# Allegro board pc043c_single_maroc_28.brd
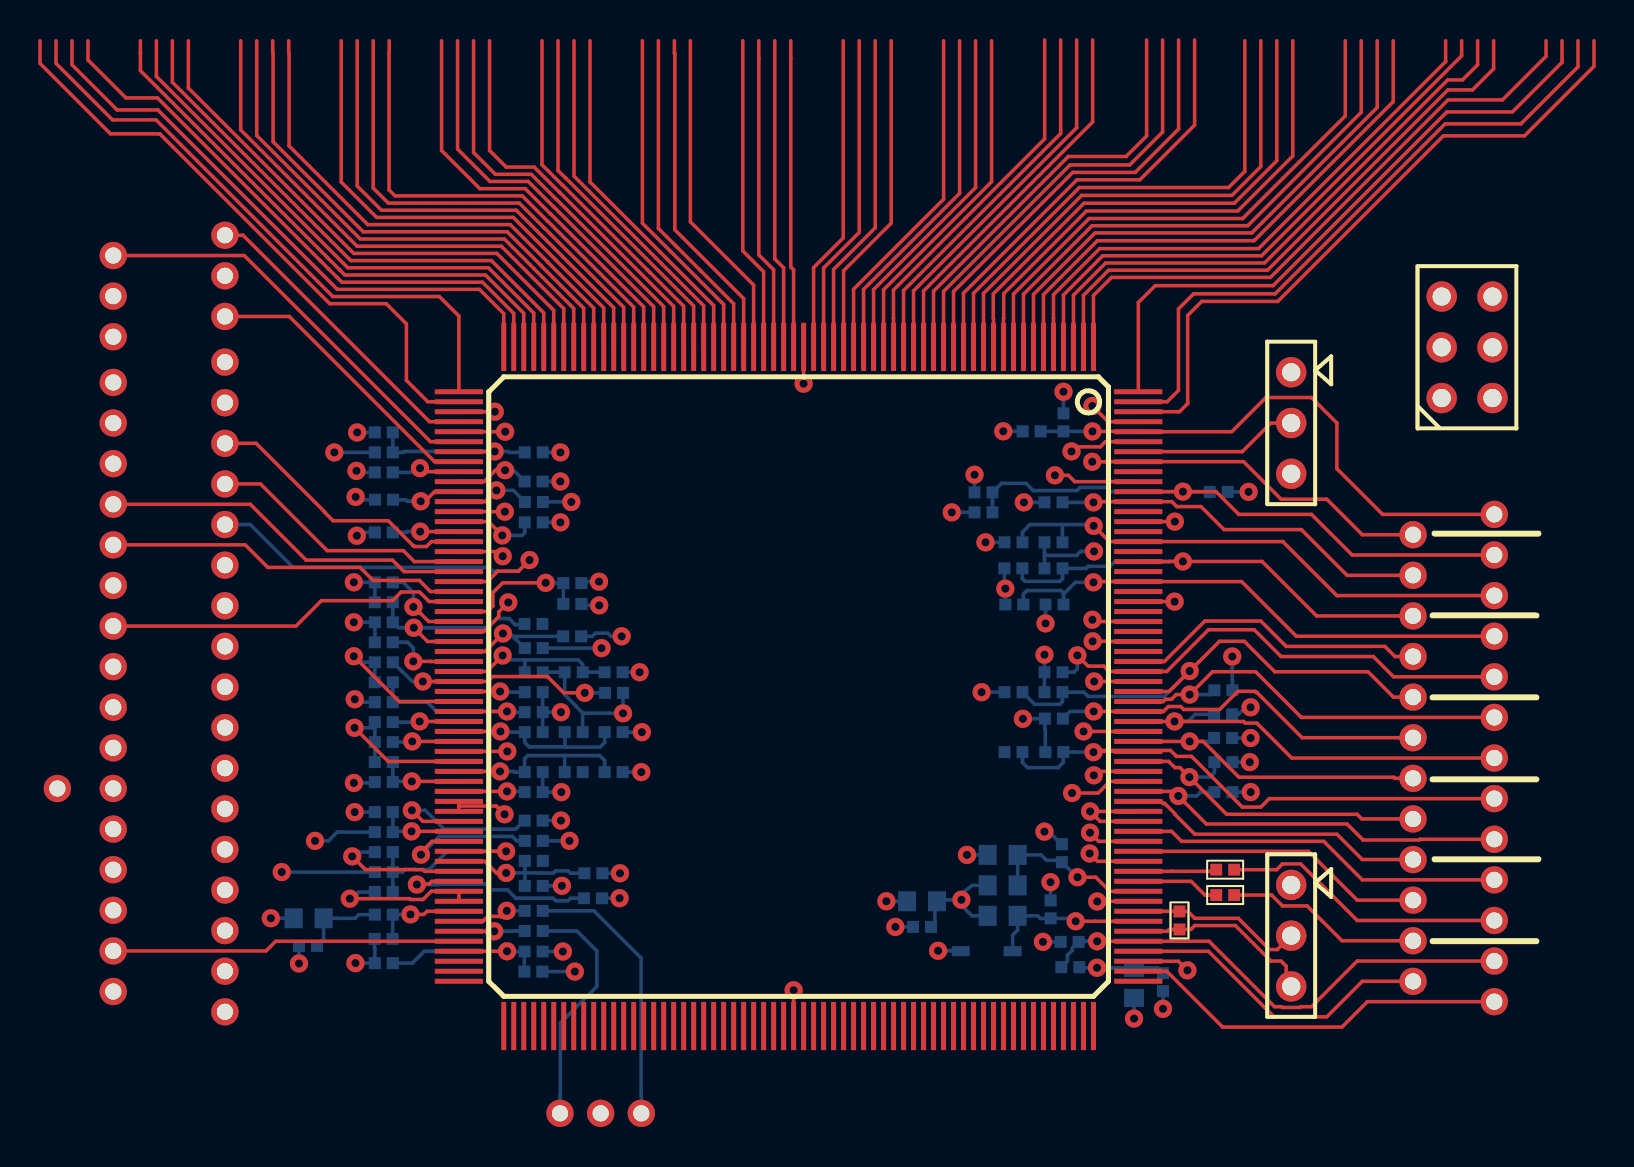
[diagram p0: board, top side]
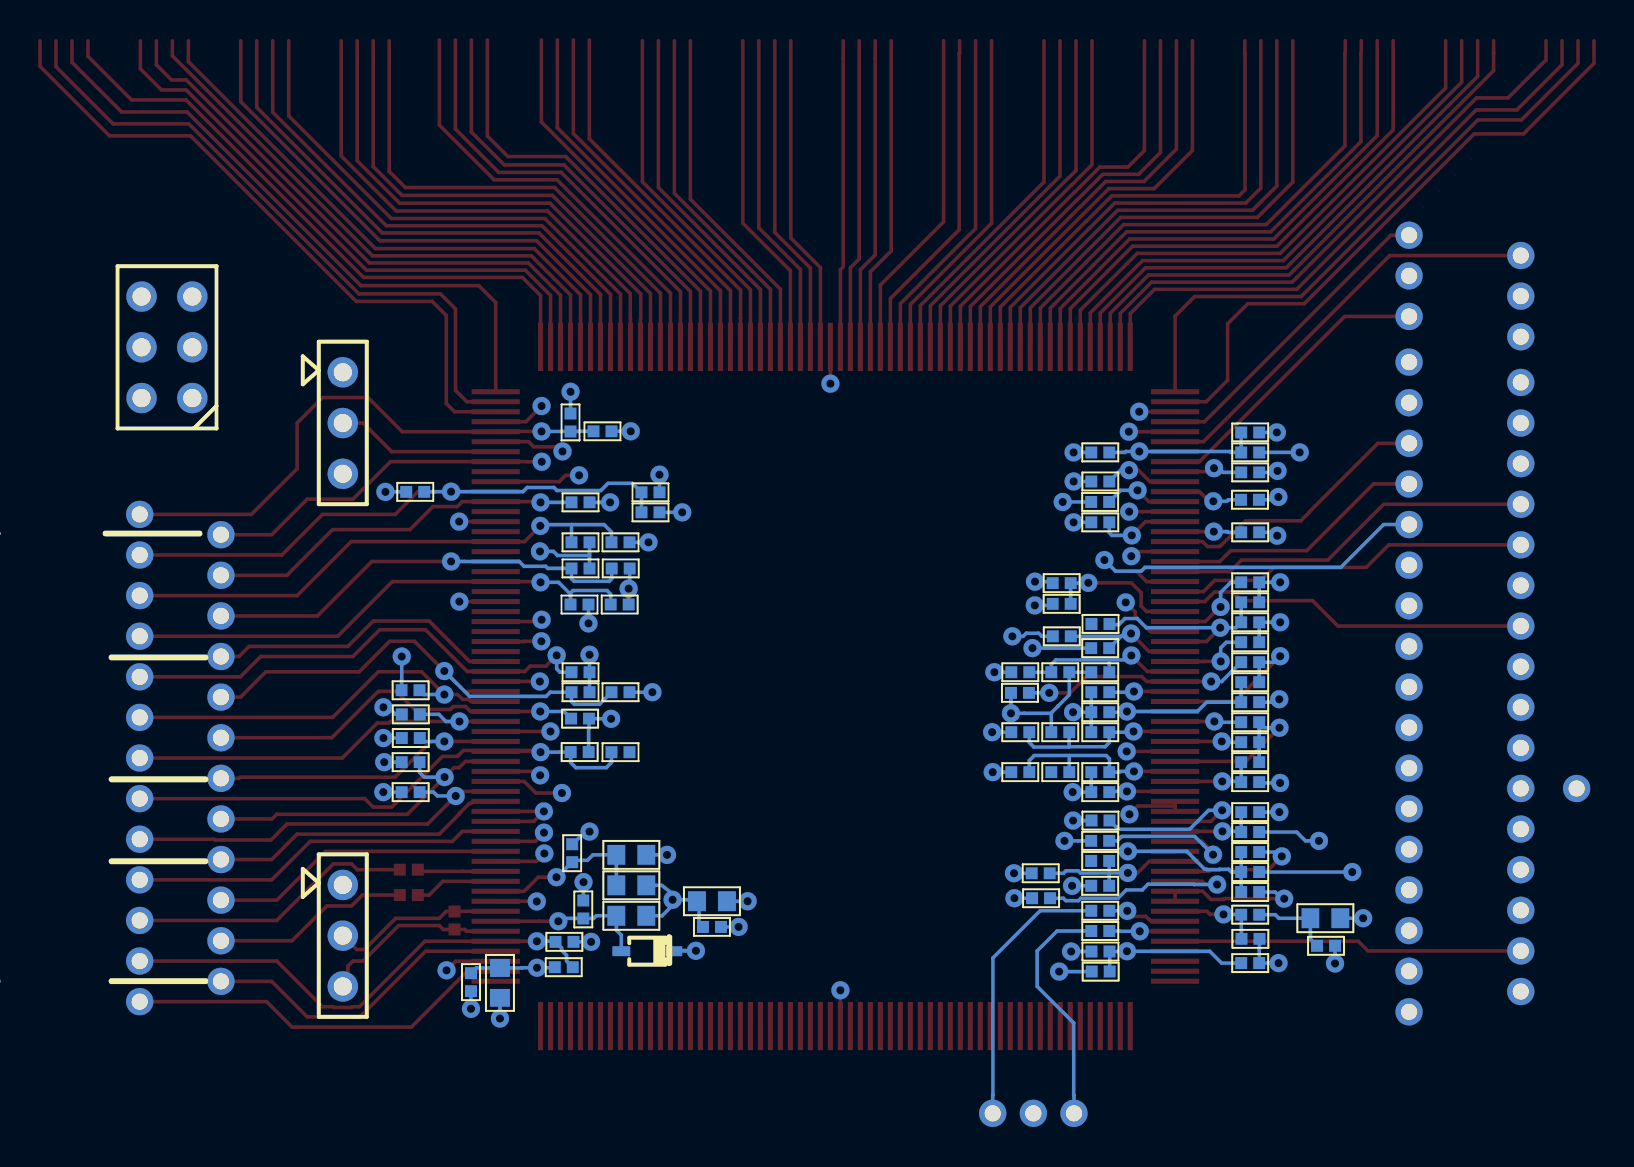
[diagram p1: board, bottom side, seen from below]

No outline. copper layers: TOP, L2, L3, L4, L5, BOTTOM. Coordinates in mm from the lowest, leftmost part position.

## Design rules (mm)
net group OR: nets OR<0> OR<1>
net group ANALOG_IN: nets ANALOG_IN<0> ANALOG_IN<1> ANALOG_IN<2> ANALOG_IN<3> ANALOG_IN<4> ANALOG_IN<5> ANALOG_IN<6> ANALOG_IN<7> ANALOG_IN<8> ANALOG_IN<9> ANALOG_IN<10> ANALOG_IN<11> ANALOG_IN<12> ANALOG_IN<13> ANALOG_IN<14> ANALOG_IN<15> ANALOG_IN<16> ANALOG_IN<17> ANALOG_IN<18> ANALOG_IN<19> ANALOG_IN<20> ANALOG_IN<21> ANALOG_IN<22> ANALOG_IN<23> ANALOG_IN<24> ANALOG_IN<25> ANALOG_IN<26> ANALOG_IN<27> ANALOG_IN<28> ANALOG_IN<29> ANALOG_IN<30> ANALOG_IN<31> ANALOG_IN<32> ANALOG_IN<33> ANALOG_IN<34> ANALOG_IN<35> ANALOG_IN<36> ANALOG_IN<37> ANALOG_IN<38> ANALOG_IN<39> ANALOG_IN<40> ANALOG_IN<41> ANALOG_IN<42> ANALOG_IN<43> ANALOG_IN<44> ANALOG_IN<45> ANALOG_IN<46> ANALOG_IN<47> ANALOG_IN<48> ANALOG_IN<49> ANALOG_IN<50> ANALOG_IN<51> ANALOG_IN<52> ANALOG_IN<53> ANALOG_IN<54> ANALOG_IN<55> ANALOG_IN<56> ANALOG_IN<57> ANALOG_IN<58> ANALOG_IN<59> ANALOG_IN<60> ANALOG_IN<61> ANALOG_IN<62> ANALOG_IN<63>
net group SUM: nets SUM<1> SUM<2> SUM<3> SUM<4> SUM<5> SUM<6> SUM<7> SUM<8>
net group TRIG: nets TRIG<0> TRIG<1> TRIG<2> TRIG<3> TRIG<4> TRIG<5> TRIG<6> TRIG<7> TRIG<8> TRIG<9> TRIG<10> TRIG<11> TRIG<12> TRIG<13> TRIG<14> TRIG<15> TRIG<16> TRIG<17> TRIG<18> TRIG<19> TRIG<20> TRIG<21> TRIG<22> TRIG<23> TRIG<24> TRIG<25> TRIG<26> TRIG<27> TRIG<28> TRIG<29> TRIG<30> TRIG<31> TRIG<32> TRIG<33> TRIG<34> TRIG<35> TRIG<36> TRIG<37> TRIG<38> TRIG<39> TRIG<40> TRIG<41> TRIG<42> TRIG<43> TRIG<44> TRIG<45> TRIG<46> TRIG<47> TRIG<48> TRIG<49> TRIG<50> TRIG<51> TRIG<52> TRIG<53> TRIG<54> TRIG<55> TRIG<56> TRIG<57> TRIG<58> TRIG<59> TRIG<60> TRIG<61> TRIG<62> TRIG<63>

## Placement (name value [footprint] x y rotation side)
C1  100nF  [C0402]  50.64 9.39 180 bottom
C2  100nF  [C0402]  16.32 9.54 0 bottom
C3  100nF  [C0402]  25.75 24.68 180 bottom
C4  100nF  [C0402]  50.33 35.38 270 bottom
C5  100nF  [C0402]  49.83 29.38 0 bottom
C6  100nF  [C0402]  16.33 34.88 0 bottom
C7  100nF  [C0402]  49.83 28.07 0 bottom
C8  100nF  [C0402]  16.33 33.88 0 bottom
C9  100nF  [C0402]  25.76 26.3 180 bottom
C10  100nF  [C0402]  49.88 26.27 0 bottom
C11  100nF  [C0402]  16.33 18.38 0 bottom
C12  100nF  [C0402]  49.83 21.88 0 bottom
C13  100nF  [C0402]  16.33 23.38 0 bottom
C14  100nF  [C0402]  16.33 15.88 0 bottom
C15  100nF  [C0402]  16.33 13.88 0 bottom
C16  100nF  [C0402]  49.87 18.88 0 bottom
C17  100nF  [C0402]  16.33 11.88 0 bottom
C18  100nF  [C0402]  16.33 32.88 0 bottom
C19  100nF  [C0402]  23.83 17.88 180 bottom
C20  100nF  [C0402]  16.33 29.88 0 bottom
C21  100nF  [C0402]  23.83 19.88 180 bottom
C22  100nF  [C0402]  16.33 24.38 0 bottom
C23  100nF  [C0402]  49.85 20.56 0 bottom
C24  100nF  [C0402]  16.33 26.38 0 bottom
C25  100nF  [C0402]  58.33 16.88 180 bottom
C26  100nF  [C0402]  16.33 19.38 0 bottom
C27  100nF  [C0402]  23.83 21.88 180 bottom
C28  100nF  [C0402]  23.83 30.38 180 bottom
C29  100nF  [C0402]  23.83 22.88 0 bottom
C30  100nF  [C0402]  23.83 14.44 180 bottom
C31  100nF  [C0402]  58.33 21.98 180 bottom
C32  100nF  [C0402]  23.83 32.43 180 bottom
C33  100nF  [C0402]  23.83 20.88 180 bottom
C34  100nF  [C0402]  26.81 12.82 180 bottom
C35  100nF  [C0402]  49.83 22.88 0 bottom
C36  100nF  [C0402]  23.84 31.4 180 bottom
C37  100nF  [C0402]  58.33 18.38 180 bottom
C38  100nF  [C0402]  58.1 31.91 180 bottom
C39  100nF  [C0402]  16.34 31.51 0 bottom
C40  100nF  [C0402]  16.33 27.38 0 bottom
C41  100nF  [C0402]  23.83 16.88 180 bottom
C42  100nF  [C0402]  58.32 20.77 180 bottom
C43  100nF  [C0402]  49.83 31.38 0 bottom
C44  100nF  [C0402]  23.82 8.9 180 bottom
C45  100nF  [C0402]  23.82 15.46 180 bottom
C46  100nF  [C0402]  58.32 19.59 180 bottom
C47  100nF  [C0402]  16.33 20.38 0 bottom
C50  100nF  [C0402]  49.69 11.01 270 bottom
C51  100nF  [C0402]  50.25 13.82 270 bottom
C52  10uF  [C0603]  53.86 7.33 90 bottom
C53  10uF  [C0603]  12.57 10.57 0 bottom
C54  10uF  [C0603]  43.25 11.42 0 bottom
D1  -  [SOD323_INV]  46.49 8.92 180 bottom
J1  -  [BAR2X6FD_254]  69.05 0 270 top
J3  -  [CONHE13D3X1M]  61.72 12.24 270 top
J4  -  [CONHE13D3X1M]  61.72 37.89 270 top
LK1  -  [1-HOLE_0-8P]  71.88 8.43 0 top
LK2  -  [1-HOLE_0-8P]  8.38 9.95 0 top
LK3  -  [1-HOLE_0-8P]  2.79 33.32 0 top
LK4  -  [1-HOLE_0-8P]  71.88 30.78 0 top
LK5  -  [1-HOLE_0-8P]  71.88 26.71 0 top
LK6  -  [1-HOLE_0-8P]  67.82 29.76 0 top
LK7  -  [1-HOLE_0-8P]  67.82 25.7 0 top
LK8  -  [1-HOLE_0-8P]  2.79 35.35 0 top
LK9  -  [1-HOLE_0-8P]  71.88 24.68 0 top
LK10  -  [1-HOLE_0-8P]  67.82 21.63 0 top
LK11  -  [1-HOLE_0-8P]  2.79 23.16 0 top
LK12  -  [1-HOLE_0-8P]  8.38 16.05 0 top
LK13  -  [1-HOLE_0-8P]  71.88 16.55 0 top
LK14  -  [1-HOLE_0-8P]  2.79 13 0 top
LK15  -  [1-HOLE_0-8P]  8.38 7.92 0 top
LK16  -  [1-HOLE_0-8P]  8.38 38.4 0 top
LK17  -  [1-HOLE_0-8P]  2.79 15.03 0 top
LK18  -  [1-HOLE_0-8P]  8.38 36.37 0 top
LK19  -  [1-HOLE_0-8P]  8.38 18.08 0 top
LK20  -  [1-HOLE_0-8P]  8.38 24.17 0 top
LK21  -  [1-HOLE_0-8P]  67.82 19.6 0 top
LK22  -  [1-HOLE_0-8P]  2.79 27.22 0 top
LK23  -  [1-HOLE_0-8P]  71.88 14.52 0 top
LK24  -  [1-HOLE_0-8P]  2.79 19.09 0 top
LK25  -  [1-HOLE_0-8P]  8.38 22.14 0 top
LK26  -  [1-HOLE_0-8P]  71.88 6.39 0 top
LK27  -  [1-HOLE_0-8P]  2.79 17.06 0 top
LK28  -  [1-HOLE_0-8P]  71.88 12.49 0 top
LK29  -  [1-HOLE_0-8P]  67.82 11.47 0 top
LK30  -  [1-HOLE_0-8P]  0 17.06 0 top
LK31  -  [1-HOLE_0-8P]  2.79 39.67 0 top
LK32  -  [1-HOLE_0-8P]  8.38 26.21 0 top
LK33  -  [1-HOLE_0-8P]  8.38 11.98 0 top
LK34  -  [1-HOLE_0-8P]  71.88 20.62 0 top
LK35  -  [1-HOLE_0-8P]  8.38 42.72 0 top
LK36  -  [1-HOLE_0-8P]  2.79 21.13 0 top
LK37  -  [1-HOLE_0-8P]  2.79 6.9 0 top
LK38  -  [1-HOLE_0-8P]  71.88 22.65 0 top
LK39  -  [1-HOLE_0-8P]  2.79 41.7 0 top
LK40  -  [1-HOLE_0-8P]  67.82 15.54 0 top
LK41  -  [1-HOLE_0-8P]  71.88 28.75 0 top
LK42  -  [1-HOLE_0-8P]  2.79 37.38 0 top
LK43  -  [1-HOLE_0-8P]  8.38 28.24 0 top
LK44  -  [1-HOLE_0-8P]  2.79 10.97 0 top
LK45  -  [1-HOLE_0-8P]  71.88 18.59 0 top
LK46  -  [1-HOLE_0-8P]  67.82 27.73 0 top
LK47  -  [1-HOLE_0-8P]  8.38 5.89 0 top
LK48  -  [1-HOLE_0-8P]  8.38 14.01 0 top
LK49  -  [1-HOLE_0-8P]  67.82 17.57 0 top
LK50  -  [1-HOLE_0-8P]  8.38 20.11 0 top
LK51  -  [1-HOLE_0-8P]  67.82 9.44 0 top
LK52  -  [1-HOLE_0-8P]  71.88 10.46 0 top
LK53  -  [1-HOLE_0-8P]  8.38 30.27 0 top
LK54  -  [1-HOLE_0-8P]  25.15 0.81 0 top
LK55  -  [1-HOLE_0-8P]  27.18 0.81 0 top
LK56  -  [1-HOLE_0-8P]  29.21 0.81 0 top
LK57  -  [1-HOLE_0-8P]  8.38 40.68 0 top
LK58  -  [1-HOLE_0-8P]  67.82 23.67 0 top
LK59  -  [1-HOLE_0-8P]  2.79 8.93 0 top
LK60  -  [1-HOLE_0-8P]  8.38 44.75 0 top
LK61  -  [1-HOLE_0-8P]  8.38 34.33 0 top
LK62  -  [1-HOLE_0-8P]  2.79 31.29 0 top
LK63  -  [1-HOLE_0-8P]  67.82 13.51 0 top
LK64  -  [1-HOLE_0-8P]  8.38 32.3 0 top
LK65  -  [1-HOLE_0-8P]  2.79 29.25 0 top
LK66  -  [1-HOLE_0-8P]  2.79 43.73 0 top
LK67  -  [1-HOLE_0-8P]  2.79 25.19 0 top
LK68  -  [1-HOLE_0-8P]  67.82 7.41 0 top
R1  51  [C0402]  58.42 11.73 0 top
R2  51  [C0402]  58.42 13 0 top
R3  10  [C0402]  50.67 8.12 180 bottom
R4  10  [C0402]  16.33 10.75 0 bottom
R5  10  [C0402]  23.83 24.09 0 bottom
R6  10  [C0402]  48.73 34.94 180 bottom
R7  10  [C0402]  47.83 29.38 180 bottom
R8  10  [C0402]  23.83 33.88 0 bottom
R9  10  [C0402]  47.82 28.07 180 bottom
R10  10  [C0402]  25.76 27.34 0 bottom
R11  10  [C0402]  47.87 26.27 180 bottom
R12  10  [C0402]  16.33 17.38 180 bottom
R13  10  [C0402]  47.83 21.88 180 bottom
R14  100  [C0402]  27.85 21.85 0 bottom
R15  10  [C0402]  16.33 14.88 180 bottom
R16  10  [C0402]  16.33 12.88 180 bottom
R17  100  [C0402]  47.83 18.88 180 bottom
R18  51  [C0402]  23.83 9.93 180 bottom
R19  51  [C0402]  23.83 10.94 180 bottom
R20  XX  [C0402]  25.83 17.88 0 bottom
R21  XX  [C0402]  27.83 17.88 180 bottom
R22  XX  [C0402]  25.83 19.88 0 bottom
R23  XX  [C0402]  27.83 19.88 180 bottom
R24  100  [C0402]  56.13 10.46 270 top
R25  XX  [C0402]  23.82 25.3 0 bottom
R26  XX  [C0402]  16.33 25.38 0 bottom
R27  1k  [C0402]  26.79 11.57 0 bottom
R28  XX  [C0402]  25.83 22.88 180 bottom
R29  XX  [C0402]  27.83 22.88 180 bottom
R30  XX  [C0402]  16.33 21.38 180 bottom
R31  XX  [C0402]  16.33 22.38 0 bottom
R32  XX  [C0402]  23.83 13.44 0 bottom
R33  XX  [C0402]  23.83 12.19 180 bottom
R34  XX  [C0402]  46.33 31.88 180 bottom
R35  XX  [C0402]  46.33 30.88 0 bottom
R36  XX  [C0402]  23.81 7.9 0 bottom
R37  XX  [C0402]  16.33 8.32 0 bottom
R42  82  [C0603]  47.29 10.69 180 bottom
R44  150  [C0603]  47.29 12.22 180 bottom
R45  120  [C0603]  47.29 13.74 0 bottom
R46  3.3  [C0402]  55.31 7.37 90 bottom
R47  3.3  [C0402]  12.54 9.19 0 bottom
R48  3.3  [C0402]  43.25 10.14 180 bottom
U1  -  [PQFP240_050]  51.83 39.16 270 top

## Library data of the parts
C1-C47 C50 C51 = CAPCERSMDCL2: part number: CAPCERSMDCL2_0402-100NF,16V_GEN; tolerance: 10%
C52-C54 = CAPCERSMDCL2: part number: CAPCERSMDCL2_0603-10UF_X5R,6.3V; tolerance: 5%
D1 = DIODE_CA: part number: DIODE_CA_SCHOTTKY-RB751V40T1
J1 = CON6P: part number: CON6P-SSW103_01GD
J3 J4 = CON3P: part number: CON3P-SIL254D
LK1-LK68 = 1-HOLE: part number: 1-HOLE_0-8-BASE
R1 R2 R18 R19 = RSMD0402: part number: RSMD0402_1/16W-51,1%; tolerance: 1%
R3-R13 R15 R16 = RSMD0402: part number: RSMD0402_1/16W-10R,5%; tolerance: 5%
R14 R17 = RSMD0402: part number: RSMD0402_1/16W-100,0.1%_GEN; tolerance: 0.1%
R20-R23 R25 R26 R28-R37 = RSMD0402: part number: RSMD0402_0.0625W-XX,1%; tolerance: 1%
R24 = RSMD0402: part number: RSMD0402_1/16W-100,1%; tolerance: 1%
R27 = RSMD0402: part number: RSMD0402_1/16W-1K,5%; tolerance: 5%
R42 = RSMD0603: part number: RSMD0603_1/10W-82,1%; tolerance: 1%
R44 = RSMD0603: part number: RSMD0603_1/10W-150,1%; tolerance: 1%
R45 = RSMD0603: part number: RSMD0603_1/10W-120,1%; tolerance: 1%
R46-R48 = RSMD0402: part number: RSMD0402_1/16W-3.3R,5%; tolerance: 5%
U1 = MAROC3: part number: MAROC3_PQFP-IN2P3

## Footprints (pads in the part's own frame, mm; a bottom-side part is the same pattern mirrored in y, then rotated)
1-HOLE_0-8P
  round 1.372 hole 0.813: 1(0,0)
BAR2X6FD_254
  round 1.524 hole 0.914: 1(-36.6,0.2) 2(-36.6,2.74) 3(-39.14,0.2) 4(-39.14,2.74) 5(-41.68,0.2) 6(-41.68,2.74)
C0402
  rect 0.6x0.6 smd: 1(-0.45,0) 2(0.45,0)
C0603
  rect 0.9x1 smd: 1(-0.75,0) 2(0.75,0)
CONHE13D3X1M
  round 1.524 hole 0.914: 1(0,0) 2(2.54,0) 3(5.08,0)
PQFP240_050
  rect 2.413x0.254 smd: 1(0,0) 2(0,-0.5) 3(0,-1) 4(0,-1.5) 5(0,-2) 6(0,-2.5) 7(0,-3) 8(0,-3.5) 9(0,-4) 10(0,-4.5) 11(0,-5) 12(0,-5.5) 13(0,-6) 14(0,-6.5) 15(0,-7) 16(0,-7.5) 17(0,-8) 18(0,-8.5) 19(0,-9) 20(0,-9.5) 21(0,-10) 22(0,-10.5) 23(0,-11) 24(0,-11.5) 25(0,-12) 26(0,-12.5) 27(0,-13) 28(0,-13.5) 29(0,-14) 30(0,-14.5) 31(0,-15) 32(0,-15.5) 33(0,-16) 34(0,-16.5) 35(0,-17) 36(0,-17.5) 37(0,-18) 38(0,-18.5) 39(0,-19) 40(0,-19.5) 41(0,-20) 42(0,-20.5) 43(0,-21) 44(0,-21.5) 45(0,-22) 46(0,-22.5) 47(0,-23) 48(0,-23.5) 49(0,-24) 50(0,-24.5) 51(0,-25) 52(0,-25.5) 53(0,-26) 54(0,-26.5) 55(0,-27) 56(0,-27.5) 57(0,-28) 58(0,-28.5) 59(0,-29) 60(0,-29.5) 121(33.987,-29.5) 122(33.987,-29) 123(33.987,-28.5) 124(33.987,-28) 125(33.987,-27.5) 126(33.987,-27) 127(33.987,-26.5) 128(33.987,-26) 129(33.987,-25.5) 130(33.987,-25) 131(33.987,-24.5) 132(33.987,-24) 133(33.987,-23.5) 134(33.987,-23) 135(33.987,-22.5) 136(33.987,-22) 137(33.987,-21.5) 138(33.987,-21) 139(33.987,-20.5) 140(33.987,-20) 141(33.987,-19.5) 142(33.987,-19) 143(33.987,-18.5) 144(33.987,-18) 145(33.987,-17.5) 146(33.987,-17) 147(33.987,-16.5) 148(33.987,-16) 149(33.987,-15.5) 150(33.987,-15) 151(33.987,-14.5) 152(33.987,-14) 153(33.987,-13.5) 154(33.987,-13) 155(33.987,-12.5) 156(33.987,-12) 157(33.987,-11.5) 158(33.987,-11) 159(33.987,-10.5) 160(33.987,-10) 161(33.987,-9.5) 162(33.987,-9) 163(33.987,-8.5) 164(33.987,-8) 165(33.987,-7.5) 166(33.987,-7) 167(33.987,-6.5) 168(33.987,-6) 169(33.987,-5.5) 170(33.987,-5) 171(33.987,-4.5) 172(33.987,-4) 173(33.987,-3.5) 174(33.987,-3) 175(33.987,-2.5) 176(33.987,-2) 177(33.987,-1.5) 178(33.987,-1) 179(33.987,-0.5) 180(33.987,0)
  rect 0.254x2.413 smd: 61(2.244,-31.744) 62(2.744,-31.744) 63(3.244,-31.744) 64(3.744,-31.744) 65(4.244,-31.744) 66(4.744,-31.744) 67(5.244,-31.744) 68(5.744,-31.744) 69(6.244,-31.744) 70(6.744,-31.744) 71(7.244,-31.744) 72(7.744,-31.744) 73(8.243,-31.744) 74(8.743,-31.744) 75(9.243,-31.744) 76(9.743,-31.744) 77(10.243,-31.744) 78(10.743,-31.744) 79(11.243,-31.744) 80(11.743,-31.744) 81(12.243,-31.744) 82(12.743,-31.744) 83(13.243,-31.744) 84(13.743,-31.744) 85(14.243,-31.744) 86(14.743,-31.744) 87(15.243,-31.744) 88(15.743,-31.744) 89(16.244,-31.744) 90(16.744,-31.744) 91(17.244,-31.744) 92(17.744,-31.744) 93(18.244,-31.744) 94(18.744,-31.744) 95(19.244,-31.744) 96(19.744,-31.744) 97(20.244,-31.744) 98(20.744,-31.744) 99(21.244,-31.744) 100(21.744,-31.744) 101(22.244,-31.744) 102(22.744,-31.744) 103(23.244,-31.744) 104(23.744,-31.744) 105(24.244,-31.744) 106(24.744,-31.744) 107(25.244,-31.744) 108(25.744,-31.744) 109(26.244,-31.744) 110(26.744,-31.744) 111(27.244,-31.744) 112(27.744,-31.744) 113(28.244,-31.744) 114(28.744,-31.744) 115(29.244,-31.744) 116(29.744,-31.744) 117(30.244,-31.744) 118(30.744,-31.744) 119(31.244,-31.744) 120(31.744,-31.744) 181(31.744,2.244) 182(31.244,2.244) 183(30.744,2.244) 184(30.244,2.244) 185(29.744,2.244) 186(29.244,2.244) 187(28.744,2.244) 188(28.244,2.244) 189(27.744,2.244) 190(27.244,2.244) 191(26.744,2.244) 192(26.244,2.244) 193(25.744,2.244) 194(25.244,2.244) 195(24.744,2.244) 196(24.244,2.244) 197(23.744,2.244) 198(23.244,2.244) 199(22.744,2.244) 200(22.244,2.244) 201(21.744,2.244) 202(21.244,2.244) 203(20.744,2.244) 204(20.244,2.244) 205(19.744,2.244) 206(19.244,2.244) 207(18.744,2.244) 208(18.244,2.244) 209(17.744,2.244) 210(17.244,2.244) 211(16.744,2.244) 212(16.244,2.244) 213(15.743,2.244) 214(15.243,2.244) 215(14.743,2.244) 216(14.243,2.244) 217(13.743,2.244) 218(13.243,2.244) 219(12.743,2.244) 220(12.243,2.244) 221(11.743,2.244) 222(11.243,2.244) 223(10.743,2.244) 224(10.243,2.244) 225(9.743,2.244) 226(9.243,2.244) 227(8.743,2.244) 228(8.243,2.244) 229(7.744,2.244) 230(7.244,2.244) 231(6.744,2.244) 232(6.244,2.244) 233(5.744,2.244) 234(5.244,2.244) 235(4.744,2.244) 236(4.244,2.244) 237(3.744,2.244) 238(3.244,2.244) 239(2.744,2.244) 240(2.244,2.244)
SOD323_INV
  rect 0.9x0.5 smd: 1(1.3,0) 2(-1.3,0)

## Nets
AVDD: C29.2(B<0>) J1.6(A<5>) R5.2(B<0>) R6.2(B<0>) R7.2(B<0>) R8.2(B<0>) R9.2(B<0>) R10.2(B<0>) R11.2(B<0>) R12.2(B<0>) R13.2(B<0>) R14.2(B<0>) R15.2(B<0>) R16.2(B<0>) R17.2(B<0>) R20.2(B<0>) R22.2(B<0>) R25.2(B<0>) R27.2(B<0>) R28.2(B<0>) R30.2(B<0>) R32.2(B<0>) R34.2(B<0>) R36.2(B<0>) R46.1(A<0>) R47.1(A<0>) R48.2(B<0>)
GND_SIGNAL: C1.2(B<0>) C2.1(A<0>) C3.1(A<0>) C4.1(A<0>) C5.1(A<0>) C6.1(A<0>) C7.1(A<0>) C8.1(A<0>) C9.1(A<0>) C10.1(A<0>) C11.1(A<0>) C12.1(A<0>) C13.1(A<0>) C14.1(A<0>) C15.1(A<0>) C16.1(A<0>) C17.1(A<0>) C18.1(A<0>) C19.1(A<0>) C20.1(A<0>) C21.1(A<0>) C22.1(A<0>) C23.1(A<0>) C24.1(A<0>) C25.1(A<0>) C26.1(A<0>) C27.1(A<0>) C28.1(A<0>) C30.1(A<0>) C31.1(A<0>) C32.1(A<0>) C33.1(A<0>) C34.1(A<0>) C35.1(A<0>) C36.1(A<0>) C37.1(A<0>) C38.1(A<0>) C39.1(A<0>) C40.1(A<0>) C41.1(A<0>) C42.1(A<0>) C43.1(A<0>) C44.1(A<0>) C45.1(A<0>) C46.1(A<0>) C47.1(A<0>) C50.1(A<0>) C51.1(A<0>) C52.1(A<0>) C53.1(A<0>) C54.1(A<0>) D1.1(K<0>) J1.2(A<1>) J1.4(A<3>) J1.5(A<4>) J3.1(A<0>) J4.3(A<2>) LK30.1(A<0>) LK55.1(A<0>) R21.1(A<0>) R23.1(A<0>) R26.1(A<0>) R29.1(A<0>) R31.1(A<0>) R33.1(A<0>) R35.1(A<0>) R37.1(A<0>) R45.1(A<0>) U1.30(GND_PA2) U1.63(GND_PA) U1.65(VSSA) U1.73(GND_NMOS) U1.77(GND_W) U1.85(GND_DAC) U1.92(E_FSU) U1.98(GND_WILK) U1.102(VSSA2) U1.103(VSSM) U1.109(GND_DISCRI) U1.111(VSSD) U1.112(GNDD) U1.150(VSSD2) U1.183(GNDD2) U1.189(VSSD3) U1.195(GND_DISCRI2) U1.197(VSSM2) U1.198(VSS) U1.202(GND_FSU) U1.206(GND_FSB1) U1.211(GND_FSB0) U1.217(GND_CAPA) U1.219(GND_SS) U1.227(GND_OTAG) U1.231(GND_NMOS2) U1.235(VSSI) U1.237(GND_PA3)
VDD_BUF1: C7.2(B<0>) LK7.1(A<0>) R9.1(A<0>) U1.223(VDD_BUF1)
VDD_DAC: C3.2(B<0>) LK3.1(A<0>) R5.1(A<0>) U1.87(VDD_DAC)
VDD_DISCRI: C14.2(B<0>) LK14.1(A<0>) R15.1(A<0>) U1.105(VDD_DISCRI)
VDD_DISCRIADC: C15.2(B<0>) C17.2(B<0>) LK15.1(A<0>) R16.1(A<0>) U1.107(VDD_DISCRIADC) U1.193(VDD_DISCRIADC2)
VDD_FSB: C12.2(B<0>) LK10.1(A<0>) R13.1(A<0>) U1.210(VDD_FSB)
VDD_FSU1: C13.2(B<0>) LK11.1(A<0>) R14.1(A<0>) U1.90(VDD_FSU1)
VDD_FSU2: C16.2(B<0>) LK13.1(A<0>) R17.1(A<0>) U1.204(VDD_FSU2)
VDD_OTAG: C5.2(B<0>) LK5.1(A<0>) R7.1(A<0>) U1.225(VDD_OTAG)
VDD_PA: C6.2(B<0>) C8.2(B<0>) LK6.1(A<0>) R8.1(A<0>) U1.67(VDD_PA) U1.233(VDD_PA2)
VDD_PAD: C4.2(B<0>) LK4.1(A<0>) R6.1(A<0>) U1.236(VDD_PAD)
VDD_SS: C10.2(B<0>) LK9.1(A<0>) R11.1(A<0>) U1.221(VDD_SS)
VDD_W: C9.2(B<0>) LK8.1(A<0>) R10.1(A<0>) U1.83(VDD_W)
VDD_WILK: C11.2(B<0>) LK12.1(A<0>) R12.1(A<0>) U1.100(VDD_WILK)
VDDD: C1.1(A<0>) LK1.1(A<0>) R3.2(B<0>) U1.185(VDDD)
VDDD2: C2.2(B<0>) LK2.1(A<0>) R4.2(B<0>) U1.113(VDDD2)
ADC_DAV: LK54.1(A<0>) R18.1(A<0>)
ANALOG_IN<0>: U1.238(IN0)
ANALOG_IN<1>: U1.239(IN1)
ANALOG_IN<2>: U1.240(IN2)
ANALOG_IN<3>: U1.1(IN3)
ANALOG_IN<4>: U1.2(IN4)
ANALOG_IN<5>: U1.3(IN5)
ANALOG_IN<6>: U1.4(IN6)
ANALOG_IN<7>: U1.5(IN7)
ANALOG_IN<8>: U1.6(IN8)
ANALOG_IN<9>: U1.7(IN9)
ANALOG_IN<10>: U1.8(IN10)
ANALOG_IN<11>: U1.9(IN11)
ANALOG_IN<12>: U1.10(IN12)
ANALOG_IN<13>: U1.11(IN13)
ANALOG_IN<14>: U1.12(IN14)
ANALOG_IN<15>: U1.13(IN15)
ANALOG_IN<16>: U1.14(IN16)
ANALOG_IN<17>: U1.15(IN17)
ANALOG_IN<18>: U1.16(IN18)
ANALOG_IN<19>: U1.17(IN19)
ANALOG_IN<20>: U1.18(IN20)
ANALOG_IN<21>: U1.19(IN21)
ANALOG_IN<22>: U1.20(IN22)
ANALOG_IN<23>: U1.21(IN23)
ANALOG_IN<24>: U1.22(IN24)
ANALOG_IN<25>: U1.23(IN25)
ANALOG_IN<26>: U1.24(IN26)
ANALOG_IN<27>: U1.25(IN27)
ANALOG_IN<28>: U1.26(IN28)
ANALOG_IN<29>: U1.27(IN29)
ANALOG_IN<30>: U1.28(IN30)
ANALOG_IN<31>: U1.29(IN31)
ANALOG_IN<32>: U1.31(IN32)
ANALOG_IN<33>: U1.32(IN33)
ANALOG_IN<34>: U1.33(IN34)
ANALOG_IN<35>: U1.34(IN35)
ANALOG_IN<36>: U1.35(IN36)
ANALOG_IN<37>: U1.36(IN37)
ANALOG_IN<38>: U1.37(IN38)
ANALOG_IN<39>: U1.38(IN39)
ANALOG_IN<40>: U1.39(IN40)
ANALOG_IN<41>: U1.40(IN41)
ANALOG_IN<42>: U1.41(IN42)
ANALOG_IN<43>: U1.42(IN43)
ANALOG_IN<44>: U1.43(IN44)
ANALOG_IN<45>: U1.44(IN45)
ANALOG_IN<46>: U1.45(IN46)
ANALOG_IN<47>: U1.46(IN47)
ANALOG_IN<48>: U1.47(IN48)
ANALOG_IN<49>: U1.48(IN49)
ANALOG_IN<50>: U1.49(IN50)
ANALOG_IN<51>: U1.50(IN51)
ANALOG_IN<52>: U1.51(IN52)
ANALOG_IN<53>: U1.52(IN53)
ANALOG_IN<54>: U1.53(IN54)
ANALOG_IN<55>: U1.54(IN55)
ANALOG_IN<56>: U1.55(IN56)
ANALOG_IN<57>: U1.56(IN57)
ANALOG_IN<58>: U1.57(IN58)
ANALOG_IN<59>: U1.58(IN59)
ANALOG_IN<60>: U1.59(IN60)
ANALOG_IN<61>: U1.60(IN61)
ANALOG_IN<62>: U1.61(IN62)
ANALOG_IN<63>: U1.62(IN63)
CK_40M: J3.2(A<1>) R24.1(A<0>) U1.188(CK_40M)
CK_R: LK64.1(A<0>) U1.78(CK_R)
CK_SC: LK57.1(A<0>) U1.68(CK_SC)
CKB_40M: J3.3(A<2>) R24.2(B<0>) U1.186(CKB_40M)
CTEST: J4.1(A<0>)
D_R: LK67.1(A<0>) U1.82(D_R)
D_SC: LK60.1(A<0>) U1.64(D_SC)
EN_OTAG: LK58.1(A<0>) U1.213(EN_OTAG)
G_DIODE: C27.2(B<0>) LK25.1(A<0>) U1.91(G_DIODE)
HOLD1: LK62.1(A<0>) U1.79(HOLD1)
HOLD2: LK65.1(A<0>) U1.81(HOLD2)
IB_INTEG: C41.2(B<0>) LK44.1(A<0>) U1.101(IB_INTEG)
IB_SUM: C35.2(B<0>) LK38.1(A<0>) U1.212(IB_SUM)
IB_W: C31.2(B<0>) LK34.1(A<0>) U1.209(IB_W)
IBI_BUF: C28.2(B<0>) LK31.1(A<0>) U1.74(IBI_BUF)
IBI_SS: C32.2(B<0>) LK35.1(A<0>) U1.70(IBI_SS)
IBO_DAC: C40.2(B<0>) LK43.1(A<0>) U1.84(IBO_DAC)
IBO_SS: C36.2(B<0>) LK39.1(A<0>) U1.72(IBO_SS)
IREF_DAC: C24.2(B<0>) LK22.1(A<0>) R25.1(A<0>) R26.2(B<0>) U1.86(IREF_DAC)
OR<0>: LK51.1(A<0>) R1.2(B<0>)
OR<1>: LK52.1(A<0>) R2.2(B<0>)
OUT_ADC: LK56.1(A<0>) R19.1(A<0>)
OUT_FS: J1.3(A<2>) U1.201(OUT_FS)
OUT_Q: J1.1(A<0>) U1.215(OUT_Q)
PWR_ON: R27.1(A<0>) U1.110(PWR_ON)
QBUF_R: LK61.1(A<0>) U1.76(QBUF_R)
QBUF_SC: LK63.1(A<0>) U1.199(QBUF_SC)
RAMP: LK27.1(A<0>) U1.97(RAMP)
RSTB_R: LK53.1(A<0>) U1.80(RSTB_R)
RSTN_ADC: LK68.1(A<0>) U1.184(RSTN_ADC)
RSTN_SC: LK66.1(A<0>) U1.66(RSTN_SC)
START_ADCB: LK59.1(A<0>) U1.116(START_ADCB)
SUM<1>: U1.228(SUM1)
SUM<2>: U1.226(SUM2)
SUM<3>: U1.224(SUM3)
SUM<4>: U1.222(SUM4)
SUM<5>: U1.220(SUM5)
SUM<6>: U1.218(SUM6)
SUM<7>: U1.216(SUM7)
SUM<8>: U1.214(SUM8)
TRIG<0>: LK26.1(A<0>) U1.182(OUT0)
TRIG<1>: U1.181(OUT1)
TRIG<2>: U1.180(OUT2)
TRIG<3>: U1.179(OUT3)
TRIG<4>: U1.178(OUT4)
TRIG<5>: U1.177(OUT5)
TRIG<6>: U1.176(OUT6)
TRIG<7>: U1.175(OUT7)
TRIG<8>: U1.174(OUT8)
TRIG<9>: U1.173(OUT9)
TRIG<10>: U1.172(OUT10)
TRIG<11>: U1.171(OUT11)
TRIG<12>: U1.170(OUT12)
TRIG<13>: U1.169(OUT13)
TRIG<14>: U1.168(OUT14)
TRIG<15>: U1.167(OUT15)
TRIG<16>: U1.166(OUT16)
TRIG<17>: U1.165(OUT17)
TRIG<18>: U1.164(OUT18)
TRIG<19>: U1.163(OUT19)
TRIG<20>: U1.162(OUT20)
TRIG<21>: U1.161(OUT21)
TRIG<22>: U1.160(OUT22)
TRIG<23>: U1.159(OUT23)
TRIG<24>: U1.158(OUT24)
TRIG<25>: U1.157(OUT25)
TRIG<26>: U1.156(OUT26)
TRIG<27>: U1.155(OUT27)
TRIG<28>: U1.154(OUT28)
TRIG<29>: U1.153(OUT29)
TRIG<30>: U1.152(OUT30)
TRIG<31>: U1.151(OUT31)
TRIG<32>: U1.149(OUT32)
TRIG<33>: U1.148(OUT33)
TRIG<34>: U1.147(OUT34)
TRIG<35>: U1.146(OUT35)
TRIG<36>: U1.145(OUT36)
TRIG<37>: U1.144(OUT37)
TRIG<38>: U1.143(OUT38)
TRIG<39>: U1.142(OUT39)
TRIG<40>: U1.141(OUT40)
TRIG<41>: U1.140(OUT41)
TRIG<42>: U1.139(OUT42)
TRIG<43>: U1.138(OUT43)
TRIG<44>: U1.137(OUT44)
TRIG<45>: U1.136(OUT45)
TRIG<46>: U1.135(OUT46)
TRIG<47>: U1.134(OUT47)
TRIG<48>: U1.133(OUT48)
TRIG<49>: U1.132(OUT49)
TRIG<50>: U1.131(OUT50)
TRIG<51>: U1.130(OUT51)
TRIG<52>: U1.129(OUT52)
TRIG<53>: U1.128(OUT53)
TRIG<54>: U1.127(OUT54)
TRIG<55>: U1.126(OUT55)
TRIG<56>: U1.125(OUT56)
TRIG<57>: U1.124(OUT57)
TRIG<58>: U1.123(OUT58)
TRIG<59>: U1.122(OUT59)
TRIG<60>: U1.121(OUT60)
TRIG<61>: U1.120(OUT61)
TRIG<62>: U1.119(OUT62)
TRIG<63>: U1.118(OUT63)
UNNAMED_1_MAROC3_I1_OR0: R1.1(A<0>) U1.191(OR_0)
UNNAMED_1_MAROC3_I1_OR1: R2.1(A<0>) U1.192(OR_1)
UNNAMED_2_CAPCERSMDCL2_I82_B: C53.2(B<0>) R4.1(A<0>) R47.2(B<0>)
UNNAMED_2_CAPCERSMDCL2_I84_B: C52.2(B<0>) R3.1(A<0>) R46.2(B<0>)
UNNAMED_3_CAPCERSMDCL2_I242_B: C54.2(B<0>) R42.2(B<0>) R44.2(B<0>) R48.1(A<0>)
UNNAMED_3_CON3P_I231_A: J4.2(A<1>) U1.234(CTEST)
UNNAMED_3_MAROC3_I1_ADCDAV: R18.2(B<0>) U1.115(ADC_DAV)
UNNAMED_3_MAROC3_I1_OUTADC: R19.2(B<0>) U1.114(OUT_ADC)
V_BG: C25.2(B<0>) LK23.1(A<0>) U1.200(V_BG)
VB_OTAFSU: C37.2(B<0>) LK40.1(A<0>) U1.203(VB_OTAFSU)
VBI_DISCRI: C45.2(B<0>) LK48.1(A<0>) U1.104(VBI_DISCRI)
VBI_DISCRIADC: C44.2(B<0>) LK47.1(A<0>) R36.1(A<0>) R37.2(B<0>) U1.117(VBI_DISCRIADC)
VBI_FSB: C42.2(B<0>) LK45.1(A<0>) U1.207(VBI_FSB)
VBI_PA: C38.2(B<0>) LK41.1(A<0>) R34.1(A<0>) R35.2(B<0>) U1.230(VBI_PA)
VBI_TZ: C29.1(A<0>) LK32.1(A<0>) R28.1(A<0>) R29.2(B<0>) U1.89(VBI_TZ)
VBM_DISCRI: C30.2(B<0>) LK33.1(A<0>) U1.106(VBM_DISCRI)
VBO_DISCRI: C34.2(B<0>) LK37.1(A<0>) R32.1(A<0>) R33.2(B<0>) U1.108(VBO_DISCRI)
VBO_FSB: C46.2(B<0>) LK49.1(A<0>) U1.205(VBO_FSB)
VBO_TZ: C33.2(B<0>) LK36.1(A<0>) R30.1(A<0>) R31.2(B<0>) U1.93(VBO_TZ)
VCASC_FSU: C47.2(B<0>) LK50.1(A<0>) U1.94(VCASC_FSU)
VCASC_NMOS: C43.2(B<0>) LK46.1(A<0>) U1.229(VCASC_NMOS)
VCASC_PMOS: C39.2(B<0>) LK42.1(A<0>) U1.71(VCASC_PMOS)
VGAIN_PA: C18.2(B<0>) LK16.1(A<0>) U1.69(VGAIN_PA)
VH: C51.2(B<0>) R44.1(A<0>) R45.2(B<0>) U1.190(VH)
VL: C50.2(B<0>) D1.2(A<0>) R42.1(A<0>) U1.187(VL)
VREF_DAC: C22.2(B<0>) LK20.1(A<0>) U1.88(VREF_DAC)
VREF_FSB: C23.2(B<0>) LK21.1(A<0>) U1.208(VREF_FSB)
VREF_FSU: C26.2(B<0>) LK24.1(A<0>) U1.96(VREF_FSU)
VREF_RAMP: C19.2(B<0>) LK17.1(A<0>) R20.1(A<0>) R21.2(B<0>) U1.99(VREF_RAMP)
VREF_SS: C20.2(B<0>) LK18.1(A<0>) U1.75(VREF_SS)
VSLOPE: C21.2(B<0>) LK19.1(A<0>) R22.1(A<0>) R23.2(B<0>) U1.95(VSLOPE)
VTH0: LK28.1(A<0>) U1.196(VTH0)
VTH1: LK29.1(A<0>) U1.194(VTH1)

Pads without a net: U1 232

## Via types
v1: diameter 0.914, hole 0.406, TOP to BOTTOM, 147 vias

## Routing (per net, layer and track width the routed paths; a pad name or vN(x,y) marks a point on that pad's centre or on a via; arc(x,y) is an arc through that point)
AVDD: length 33.1
  BOTTOM w0.18: R36.2 v1(25.89,7.9) ; R48.2 v1(41.92,10.14) ; R9.2 47.37,27.11 v1(47.42,27.06) R11.2 ; R7.2 v1(46.43,29.38) ; R10.2 26.29,27.41 v1(27.1,27.41) ; R6.2 v1(47.32,34.94) ; R47.1 v1(12.09,8.31) ; v1(12.89,14.44) 13.56,14.44 14,14.88 R15.2 ; v1(14.88,21.53) 15.02,21.38 R30.2 ; R8.2 v1(25.16,33.88) ; v1(11.23,12.88) R16.2 ; 26.28,20.83 R22.2 ; 26.28,20.83 27.62,20.83 27.62,20.82 v1(28.3,20.82) R14.2 ; 26.28,20.83 26.28,20.84 25.94,21.18 25.94,21.19 25.38,21.75 R28.2 C29.2 ; v1(14.83,17.34) 15.84,17.34 R12.2 ; R27.2 v1(28.12,11.57) ; R34.2 v1(45.88,32.76) ; R46.1 v1(55.31,6.04) ; R13.2 v1(46.24,21.88) ; R5.2 v1(27.22,24.09)
GND_SIGNAL: length 146.2
  TOP w0.18: U1.231 50.89,32.42 50.58,32.73 v1(49.9,32.73) ; 20.09,11.87 20.03,11.92 18.71,11.92 18.29,11.51 17.67,11.51 17.63,11.55 v1(14.63,11.55) ; 20.09,11.87 U1.111 ; 20.09,11.87 U1.112 ; U1.183 56.08,8.42 v1(56.53,7.96) ; U1.211 v1(51.87,22.42) ; v1(51.78,36.2) 52.56,35.42 U1.237 ; U1.92 17.09,21.42 v1(14.83,23.68) ; U1.73 21.71,30.92 21.71,30.91 v1(22.38,30.91) ; U1.85 21.33,24.92 22.08,25.67 22.08,25.9 v1(22.56,26.37) ; v1(14.87,20.1) 16.55,18.42 U1.98 ; U1.109 18.38,12.92 18.29,13 15.41,13 v1(14.75,13.66) ; 20.09,16.18 21.96,16.18 v1(22.37,15.77) ; 20.09,16.18 U1.103 ; 20.09,16.18 U1.102 ; v1(22.28,28.69) 22.27,28.69 22.04,28.92 U1.77 ; U1.195 52.09,14.42 51.66,14.85 v1(51.66,14.85) ; U1.197 52.16,15.42 v1(51.66,15.92) U1.198 ; v1(51.78,25.51) 51.87,25.42 U1.217 ; U1.219 55.5,26.42 55.5,26.41 v1(55.89,26.41) ; v1(52.02,11.41) 52.02,11.41 52.02,11.42 U1.189 ; v1(51.85,17.72) 52.04,17.92 U1.202 ; U1.206 v1(51.33,19.92) ; U1.63 v1(21.88,35.92) ; U1.30 v1(37.33,37.32) ; U1.150 v1(36.83,6.96) ; U1.227 v1(55.9,30.42) ; U1.65 v1(22.4,34.92) ; U1.235 52.43,34.42 52.17,34.16 50.96,34.16 v1(50.73,33.93)
  BOTTOM w0.18: R35.1 v1(44.74,30.88) ; v1(44.06,8.94) 44.56,8.94 ; 44.56,8.94 44.57,8.95 44.83,8.95 ; 44.56,8.94 45.17,8.94 D1.1 ; v1(14.92,31.65) 15.06,31.51 C39.1 ; 49.38,28.72 49.38,28.72 50.99,28.72 50.99,28.73 51.18,28.93 v1(51.86,28.93) ; 49.38,28.72 C7.1 ; 49.38,28.72 49.38,28.86 49.38,28.86 C5.1 ; v1(58.77,23.67) 58.77,22.5 58.78,22.5 C31.1 ; v1(45.5,13.74) R45.1 ; C52.1 v1(53.86,5.55) ; R29.1 v1(29.13,22.88) ; 15.88,20.05 15.83,20.1 v1(14.87,20.1) ; 15.88,20.05 C26.1 C11.1 ; 15.88,20.05 C47.1 ; C3.1 26.76,24.68 26.91,24.83 27.53,24.83 27.69,24.68 v1(28.23,24.68) ; C32.1 v1(25.16,32.43) ; C15.1 14.96,13.88 v1(14.75,13.66) ; C17.1 15.08,11.88 14.75,11.55 v1(14.63,11.55) ; C20.1 15.15,29.88 v1(14.98,29.71) ; R21.1 v1(29.21,17.88) ; C43.1 v1(48.35,31.38) ; v1(14.83,27.38) C40.1 C24.1 ; C8.1 v1(13.85,33.88) ; v1(48.3,20.55) C23.1 49.4,20.04 49.42,20.02 C16.1 ; C12.1 C35.1 v1(49.38,23.76) ; C21.1 C33.1 ; C33.1 v1(25.19,20.88) ; C33.1 C27.1 ; C51.1 50.22,14.28 49.6,14.9 v1(49.38,14.9) ; C10.1 v1(49.43,25.32) ; C22.1 R26.1 v1(14.83,25.38) ; C54.1 v1(41.47,11.42) ; C6.1 v1(15,34.88) ; C42.1 59.08,20.77 59.44,21.13 v1(59.69,21.13) ; C36.1 v1(25.71,31.4) ; C18.1 15.04,32.88 v1(14.96,32.96) ; C1.2 v1(49.3,9.39) ; C38.1 v1(59.59,31.91) ; R31.1 C13.1 15.13,23.38 v1(14.83,23.68) ; C14.1 v1(14.87,15.88) ; C37.1 v1(59.65,18.38) ; C25.1 v1(59.7,16.88) ; C28.1 v1(25.16,30.38) ; C9.1 26.29,26.23 v1(27.11,26.23) ; R33.1 v1(25.24,12.19) ; C19.1 C41.1 v1(25.21,16.88) ; C50.1 v1(49.68,12.37) ; C4.1 v1(50.33,36.92) ; C34.1 v1(28.14,12.82) ; C45.1 v1(25.19,15.46) ; C30.1 24.94,14.44 24.95,14.44 v1(25.62,14.44) ; R23.1 v1(29.24,19.88) ; v1(14.91,8.32) R37.1 15.88,9.01 15.87,9.02 C2.1 ; C44.1 v1(25.29,8.9) ; C53.1 v1(10.68,10.57) ; v1(59.69,19.59) C46.1
VDD_BUF1: length 24.2
  TOP w0.18: LK7.1 62.99,25.7 60.27,28.42 v1(56.3,28.42) 55.63,28.42 55.62,28.42 U1.223
  BOTTOM w0.18: v1(56.3,28.42) 52.9,28.42 52.66,28.18 51.57,28.18 51.47,28.07 C7.2 50.28,27.56 50.15,27.43 48.4,27.43 48.27,27.56 R9.1
VDD_DAC: length 30.1
  TOP w0.18: U1.87 21.39,23.92 v1(22.29,24.82)
  L3 w0.18: v1(22.29,24.82) 20.95,24.82 16.75,29.02 13.95,29.02 9.65,33.32 LK3.1
  BOTTOM w0.18: C3.2 22.43,24.68 v1(22.29,24.82) 22.64,24.82 22.92,24.54 22.93,24.54 R5.1
VDD_DISCRI: length 20.4
  TOP w0.18: v1(17.72,14.92) U1.105
  L3 w0.18: LK14.1 10.16,13 10.92,13.76 11.54,13.76 11.94,13.36 13.34,13.36 14.33,14.36 17.16,14.36 v1(17.72,14.92)
  BOTTOM w0.18: C14.2 R15.1 16.82,14.92 v1(17.72,14.92)
VDD_DISCRIADC: length 60.1
  TOP w0.18: v1(51.64,13.81) 52.03,13.42 U1.193 ; U1.107 v1(22.45,13.92)
  L3 w0.18: LK15.1 10.51,7.92 10.97,7.46 15.99,7.46 v1(22.45,13.92) 24.58,13.92 24.75,13.74 35.12,13.74 36.11,14.73 48.56,14.73 49.49,13.81 v1(51.64,13.81)
  BOTTOM w0.18: C15.2 R16.1 ; R16.1 C17.2 ; R16.1 17.27,12.88 17.41,13.02 17.86,13.02 17.88,13 18.5,13 18.51,13.02 18.6,13.02 19.5,13.92 v1(22.45,13.92)
VDD_FSB: length 25.7
  TOP w0.18: U1.210 55.61,21.92 55.82,22.12 55.83,22.12 v1(56.64,22.94) 57.12,23.42 57.12,23.42 58.14,24.43 59.37,24.43 60.9,22.9 65.57,22.9 66.84,21.63 LK10.1
  BOTTOM w0.18: R13.1 48.89,21.27 50.14,21.27 50.28,21.41 C12.2 51.35,21.88 51.56,21.67 55.37,21.67 v1(56.64,22.94)
VDD_FSU1: length 27.3
  TOP w0.18: v1(26.38,21.85) 25.33,21.85 24.52,22.66 21.76,22.66 21.51,22.42 U1.90 v1(18.28,22.42)
  L3 w0.18: LK11.1 12.27,23.16 12.45,22.98 15.94,22.98 16.51,22.42 v1(18.28,22.42)
  BOTTOM w0.18: R14.1 v1(26.38,21.85) ; C13.2 17.23,22.93 17.24,22.93 17.75,22.42 v1(18.28,22.42)
VDD_FSU2: length 28.4
  TOP w0.18: 51.87,18.92 51.92,18.97 55.69,18.97 55.93,18.72 55.98,18.67 56.74,18.67 59.27,16.13 60.2,16.13 60.62,16.55 LK13.1 ; 51.87,18.92 v1(51.83,18.88) ; 51.87,18.92 U1.204
  BOTTOM w0.18: R17.1 48.28,18.36 48.54,18.1 50.06,18.1 50.32,18.37 C16.2 50.84,18.88 50.84,18.88 v1(51.83,18.88)
VDD_OTAG: length 26.6
  TOP w0.18: v1(51.84,30.2) 52.63,29.42 U1.225 61.31,29.42 64.01,26.71 LK5.1
  BOTTOM w0.18: 50.27,30.27 50.28,30.26 C5.2 ; 50.27,30.27 48.65,30.27 48.28,29.9 R7.1 ; 50.27,30.27 51.78,30.27 v1(51.84,30.2)
VDD_PA: length 58.3
  TOP w0.18: v1(21.88,33.93) 21.56,33.93 21.55,33.92 U1.67 ; v1(51.77,33.41) 52.44,33.41 52.45,33.42 U1.233 59.34,33.42 61.21,31.54 63.5,31.54 65.28,29.76 LK6.1
  L3 w0.18: v1(21.88,33.93) 23,33.93 23.75,33.18 25.54,33.18 26.68,32.04 48.02,32.04 48.06,32.08 48.64,32.08 48.68,32.04 50.4,32.04 v1(51.77,33.41)
  BOTTOM w0.18: C6.2 C8.2 17.3,33.88 17.34,33.93 v1(21.88,33.93) 22.55,33.93 22.6,33.88 R8.1
VDD_PAD: length 27.2
  TOP w0.18: v1(51.78,34.93) 54.06,34.93 U1.236 58.75,34.92 60.46,36.63 62.73,36.63 64.01,35.35 64.01,33.06 66.29,30.78 LK4.1
  BOTTOM w0.18: v1(51.78,34.93) C4.2 R6.1
VDD_SS: length 26.2
  TOP w0.18: LK9.1 61.98,24.68 59.24,27.42 U1.221 51.87,27.42 v1(51.83,27.38)
  BOTTOM w0.18: 50.33,26.79 50.93,27.38 v1(51.83,27.38) ; 50.33,26.79 50.33,26.85 50.21,26.97 48.5,26.97 48.32,26.79 R11.1 ; 50.33,26.79 C10.2
VDD_W: length 32.2
  TOP w0.18: U1.83 21.51,25.92 21.79,26.19 21.79,26.86 22.28,27.35 v1(24.43,27.35)
  L3 w0.18: LK8.1 9.45,35.35 14.22,30.58 16.2,30.58 19.43,27.35 v1(24.43,27.35)
  BOTTOM w0.18: C9.2 R10.1 24.79,27.34 24.78,27.35 v1(24.43,27.35)
VDD_WILK: length 14.2
  TOP w0.18: U1.100 v1(17.73,17.42)
  L3 w0.18: v1(17.73,17.42) 16.56,17.42 15.79,16.64 11.52,16.64 10.92,16.05 LK12.1
  BOTTOM w0.18: v1(17.73,17.42) 16.82,17.42 R12.1 C11.2
VDDD: length 24.8
  TOP w0.18: v1(52.01,9.42) U1.185 57.61,9.42 60.89,6.14 61.25,6.14 61.29,6.1 62.16,6.1 62.19,6.14 62.74,6.14 65.02,8.43 LK1.1
  BOTTOM w0.18: v1(52.01,9.42) 51.12,9.42 C1.1 51.08,9.39 50.78,9.08 50.78,8.97 50.53,8.72 50.53,8.43 R3.2
VDDD2: length 14.6
  TOP w0.18: v1(17.66,10.76) 18.34,10.76 18.49,10.92 U1.113
  L3 w0.18: LK2.1 10.32,9.95 10.39,9.87 10.97,9.87 11.04,9.95 14.74,9.95 15.55,10.76 v1(17.66,10.76)
  BOTTOM w0.18: C2.2 16.78,10.89 R4.2 16.88,10.76 v1(17.66,10.76)
ADC_DAV: length 12
  BOTTOM w0.18: R18.1 25.99,9.93 26.99,8.93 26.99,7.16 25.16,5.33 25.16,1.72 25.15,1.71 LK54.1
ANALOG_IN<0>: length 33.8
  TOP w0.18: U1.238 56.13,35.92 56.54,36.33 56.54,40.73 57.25,41.44 61.05,41.44 69.33,49.72 73.39,49.72 76.87,53.2 76.87,54.48
ANALOG_IN<1>: length 32.6
  TOP w0.18: U1.239 55.52,36.42 56.08,36.98 56.08,41.06 56.84,41.81 60.91,41.81 69.42,50.32 73.21,50.32 76.07,53.18 76.07,54.48
ANALOG_IN<2>: length 31.7
  TOP w0.18: U1.240 54.07,41.38 54.92,42.22 60.82,42.22 69.51,50.92 72.79,50.92 75.27,53.4 75.27,54.48
ANALOG_IN<3>: length 30.9
  TOP w0.18: U1.1 51.83,41.73 52.74,42.64 60.69,42.64 69.57,51.52 72.29,51.52 74.47,53.7 74.47,54.48
ANALOG_IN<4>: length 29.2
  TOP w0.18: U1.2 51.33,41.74 52.59,43 60.54,43 69.56,52.02 70.79,52.02 71.85,53.08 71.85,54.48
ANALOG_IN<5>: length 28.8
  TOP w0.18: U1.3 50.83,41.75 52.44,43.36 60.39,43.36 69.55,52.52 70.29,52.52 71.05,53.28 71.05,54.48
ANALOG_IN<6>: length 28.2
  TOP w0.18: U1.4 50.33,41.76 52.29,43.72 60.24,43.72 70.25,53.73 70.25,54.48
ANALOG_IN<7>: length 28.1
  TOP w0.18: 69.45,54.48 69.45,53.44 60.09,44.08 52.14,44.08 49.83,41.77 49.83,40.58 U1.5
ANALOG_IN<8>: length 27.2
  TOP w0.18: 66.83,54.48 66.83,51.43 59.9,44.5 59.89,44.5 59.86,44.47 52.03,44.47 49.33,41.78 U1.6
ANALOG_IN<9>: length 27
  TOP w0.18: U1.7 48.83,41.79 51.91,44.86 59.75,44.86 66.03,51.14 66.03,54.48
ANALOG_IN<10>: length 26.9
  TOP w0.18: 65.23,54.48 65.23,50.9 59.55,45.22 51.76,45.22 48.33,41.8 U1.8
ANALOG_IN<11>: length 26.7
  TOP w0.18: U1.9 47.83,41.8 51.61,45.58 59.29,45.58 64.43,50.72 64.43,54.48
ANALOG_IN<12>: length 25.7
  TOP w0.18: 61.8,54.48 61.8,48.72 59.04,45.96 51.48,45.96 47.34,41.82 47.34,40.59 47.33,40.58 U1.10
ANALOG_IN<13>: length 25.6
  TOP w0.18: U1.11 46.83,40.58 46.82,40.6 46.82,41.81 51.36,46.35 58.88,46.35 61,48.48 61,54.48
ANALOG_IN<14>: length 25.5
  TOP w0.18: U1.12 46.33,41.83 51.24,46.74 58.76,46.74 60.2,48.19 60.2,54.48
ANALOG_IN<15>: length 25.3
  TOP w0.18: 59.4,54.48 59.4,47.94 58.59,47.13 51.12,47.13 45.83,41.84 U1.13
ANALOG_IN<16>: length 22
  TOP w0.18: 56.89,54.52 56.89,50.26 54.15,47.52 51,47.52 45.33,41.85 U1.14
ANALOG_IN<17>: length 21.9
  TOP w0.18: U1.15 44.83,41.93 50.79,47.89 53.92,47.89 56.09,50.06 56.09,54.52
ANALOG_IN<18>: length 21.6
  TOP w0.18: 55.29,54.52 55.29,49.91 53.64,48.26 50.66,48.26 44.33,41.94 U1.16
ANALOG_IN<19>: length 21.5
  TOP w0.18: 54.49,54.52 54.49,49.72 53.46,48.69 50.57,48.69 43.83,41.95 U1.17
ANALOG_IN<20>: length 18.9
  TOP w0.18: U1.18 43.33,41.96 51.79,50.42 51.79,54.52
ANALOG_IN<21>: length 18.7
  TOP w0.18: 50.99,54.52 50.99,50.13 42.83,41.97 U1.19
ANALOG_IN<22>: length 18.6
  TOP w0.18: U1.20 42.33,41.98 50.19,49.84 50.19,54.52
ANALOG_IN<23>: length 18.5
  TOP w0.18: U1.21 41.83,40.58 41.83,40.59 41.83,42.01 45.46,45.64 49.39,49.57 49.39,54.52
ANALOG_IN<24>: length 17.6
  TOP w0.18: 46.73,54.48 46.73,47.42 41.33,42.02 U1.22
ANALOG_IN<25>: length 17.4
  TOP w0.18: U1.23 40.83,42.03 45.93,47.13 45.93,54.48
ANALOG_IN<26>: length 17.3
  TOP w0.18: U1.24 40.33,42.04 45.13,46.84 45.13,54.48
ANALOG_IN<27>: length 17.2
  TOP w0.18: 44.33,54.48 44.33,46.55 39.83,42.05 U1.25
ANALOG_IN<28>: length 16.3
  TOP w0.18: 41.71,54.48 41.71,45.35 39.33,42.97 U1.26
ANALOG_IN<29>: length 16.2
  TOP w0.18: 40.91,54.48 40.91,45.12 38.83,43.04 U1.27
ANALOG_IN<30>: length 16.1
  TOP w0.18: U1.28 38.33,43.11 40.11,44.89 40.11,54.48
ANALOG_IN<31>: length 15.9
  TOP w0.18: U1.29 37.83,43.13 39.31,44.61 39.31,54.48
ANALOG_IN<32>: length 15.4
  TOP w0.18: 36.69,54.48 36.69,53.6 36.69,53.6 36.69,43.16 36.83,43.02 U1.31
ANALOG_IN<33>: length 15.5
  TOP w0.18: 35.89,54.48 35.89,43.56 36.33,43.12 U1.32
ANALOG_IN<34>: length 15.6
  TOP w0.18: U1.33 35.83,43.02 35.09,43.76 35.09,53.6 35.09,53.6 35.09,54.48
ANALOG_IN<35>: length 15.8
  TOP w0.18: U1.34 35.33,42.92 34.29,43.96 34.29,54.48
ANALOG_IN<36>: length 16.6
  TOP w0.18: 31.67,54.48 31.67,45.42 34.83,42.26 U1.35
ANALOG_IN<37>: length 16.8
  TOP w0.18: U1.36 34.33,41.58 32.23,43.68 31.43,44.48 30.89,45.02 30.89,53.84 30.87,53.86 30.87,54.48
ANALOG_IN<38>: length 16.9
  TOP w0.18: 30.07,54.48 30.07,45.09 30.82,44.33 30.93,44.22 31.03,44.12 32.18,42.97 33.83,41.32 U1.37
ANALOG_IN<39>: length 17
  TOP w0.18: U1.38 33.33,41.28 30.64,43.97 30.64,43.97 29.27,45.35 29.27,54.48
ANALOG_IN<40>: length 17.9
  TOP w0.18: U1.39 32.83,41.23 30.52,43.54 30.39,43.67 30.15,43.91 26.64,47.41 26.64,54.48
ANALOG_IN<41>: length 18
  TOP w0.18: 25.84,54.48 25.84,47.7 29.94,43.6 32.33,41.22 U1.40
ANALOG_IN<42>: length 18.1
  TOP w0.18: U1.41 31.83,41.21 25.42,47.61 25.41,47.61 25.04,47.99 25.04,54.48
ANALOG_IN<43>: length 18.3
  TOP w0.18: U1.42 31.33,41.2 29.65,42.88 29.62,42.91 29.52,43.01 25.28,47.25 25.27,47.25 24.24,48.28 24.24,54.48
ANALOG_IN<44>: length 20
  TOP w0.18: 21.62,54.48 21.62,48.99 22.45,48.16 23.85,48.16 25.12,46.89 25.13,46.89 30.83,41.19 U1.43
ANALOG_IN<45>: length 20.3
  TOP w0.18: 20.82,54.48 20.82,48.89 21.91,47.8 23.7,47.8 24.97,46.53 24.98,46.53 30.33,41.18 U1.44
ANALOG_IN<46>: length 20.5
  TOP w0.18: U1.45 29.83,41.17 24.83,46.17 24.82,46.17 23.55,47.44 21.64,47.44 20.02,49.06 20.02,54.48
ANALOG_IN<47>: length 20.8
  TOP w0.18: U1.46 29.33,41.16 24.68,45.81 24.67,45.81 23.4,47.08 21.13,47.08 19.22,48.99 19.22,54.48
ANALOG_IN<48>: length 24.1
  TOP w0.18: 16.6,54.48 16.6,53.86 16.59,53.85 16.59,47.02 16.89,46.72 23.26,46.72 24.52,45.45 24.53,45.45 28.83,41.15 U1.47
ANALOG_IN<49>: length 24.4
  TOP w0.18: 15.8,54.48 15.8,47.11 16.55,46.36 23.11,46.36 24.37,45.09 24.38,45.09 28.33,41.14 U1.48
ANALOG_IN<50>: length 24.6
  TOP w0.18: 15,54.48 15,47.21 16.21,46 22.96,46 25.27,43.68 25.27,43.68 27.83,41.12 U1.49
ANALOG_IN<51>: length 24.8
  TOP w0.18: U1.50 27.33,41.11 24.91,43.53 24.91,43.54 22.81,45.64 15.97,45.64 14.2,47.41 14.2,54.48
ANALOG_IN<52>: length 25.8
  TOP w0.18: 11.58,54.48 11.58,53.86 11.59,53.85 11.59,49.22 15.53,45.28 22.66,45.28 24.55,43.39 24.55,43.38 26.83,41.1 U1.51
ANALOG_IN<53>: length 26
  TOP w0.18: U1.52 26.33,41.09 24.19,43.23 24.19,43.24 22.51,44.92 15.3,44.92 10.79,49.43 10.79,53.85 10.78,53.86 10.78,54.48
ANALOG_IN<54>: length 26.1
  TOP w0.18: 9.98,54.48 9.98,49.73 15.15,44.56 22.36,44.56 23.83,43.09 23.83,43.08 25.83,41.09 U1.53
ANALOG_IN<55>: length 26.2
  TOP w0.18: 9.18,54.48 9.18,50.01 14.99,44.2 22.21,44.2 23.47,42.94 23.47,42.93 25.33,41.08 U1.54
ANALOG_IN<56>: length 27.1
  TOP w0.18: U1.55 24.83,40.99 21.98,43.84 14.83,43.84 6.55,52.11 6.55,54.48
ANALOG_IN<57>: length 27.1
  TOP w0.18: 5.75,54.48 5.75,52.4 14.68,43.48 21.71,43.48 24.33,40.86 U1.56
ANALOG_IN<58>: length 27.3
  TOP w0.18: 4.95,54.48 4.95,52.69 13.87,43.78 14.53,43.12 21.56,43.12 23.83,40.85 U1.57
ANALOG_IN<59>: length 27.4
  TOP w0.18: U1.58 23.33,40.84 21.41,42.76 14.38,42.76 14.14,43 4.15,52.98 4.15,53.86 4.15,53.86 4.15,54.48
ANALOG_IN<60>: length 29.2
  TOP w0.18: U1.59 22.83,40.83 21.27,42.4 14.23,42.4 13.99,42.64 13.57,43.06 13.15,43.48 5.01,51.62 3.43,51.62 1.53,53.52 1.53,54.48
ANALOG_IN<61>: length 29.6
  TOP w0.18: 0.73,54.48 0.73,53.28 2.99,51.02 5.02,51.02 14,42.04 21.12,42.04 22.33,40.83 U1.60
ANALOG_IN<62>: length 30.3
  TOP w0.18: -0.07,54.48 -0.07,53.35 2.76,50.52 4.94,50.52 13.78,41.68 19.11,41.68 20.09,40.7 U1.61
ANALOG_IN<63>: length 30.8
  TOP w0.18: -0.87,54.48 -0.87,53.35 2.66,49.82 5.13,49.82 13.21,41.73 13.63,41.32 16.45,41.32 17.46,40.31 17.46,37.49 18.53,36.42 U1.62
CK_40M: length 8.9
  TOP w0.18: U1.188 56.3,10.92 56.31,10.91 ; J3.2 61.03,9 60.64,9 59.08,10.56 56.9,10.56 56.55,10.91 56.31,10.91 ; 56.31,10.91 R24.1
CK_R: length 13.3
  TOP w0.18: LK64.1 10.16,32.3 13.5,28.96 17.31,28.96 17.86,28.42 U1.78
CK_SC: length 14.7
  TOP w0.18: U1.68 18.87,33.42 11.6,40.68 LK57.1
CKB_40M: length 9.5
  TOP w0.18: J3.3 61.47,7.41 61.47,8.17 61.21,8.43 60.71,8.43 58.93,10.2 56.9,10.2 56.7,10.01 R24.2 55.62,10.01 55.53,9.92 U1.186
D_R: length 18.2
  TOP w0.18: U1.82 18.6,26.42 18.12,26.9 17.2,26.9 16.76,26.46 13.21,26.46 11.94,25.19 LK67.1
D_SC: length 15.6
  TOP w0.18: LK60.1 9.28,44.75 18.62,35.42 U1.64
EN_OTAG: length 15.3
  TOP w0.18: U1.213 55.38,23.42 57.4,25.44 60.2,25.44 61.47,24.17 66.41,24.17 66.92,23.67 LK58.1
G_DIODE: length 17.7
  TOP w0.18: U1.91 v1(22.15,21.92)
  L3 w0.18: LK25.1 11.98,22.14 12.45,22.6 15.54,22.6 16.42,21.72 20.32,21.72 20.52,21.92 v1(22.15,21.92)
  BOTTOM w0.18: v1(22.15,21.92) 22.18,21.88 C27.2
HOLD1: length 18.7
  TOP w0.18: U1.79 17.34,27.92 16.76,28.49 12.45,28.49 9.65,31.29 LK62.1
HOLD2: length 18.3
  TOP w0.18: U1.81 18.66,26.92 18.29,27.29 18.29,27.3 18.11,27.48 15.79,27.48 15.14,28.13 10.52,28.13 9.4,29.25 LK65.1
IB_INTEG: length 25.5
  TOP w0.18: U1.101 v1(22.49,16.92)
  L3 w0.18: LK44.1 9.25,10.97 9.78,11.5 13.48,11.5 14.22,12.24 16.88,12.24 17.62,12.98 18.55,12.98 22.05,16.48 22.05,16.48 v1(22.49,16.92)
  BOTTOM w0.18: v1(22.49,16.92) 23.34,16.92 C41.2
IB_SUM: length 24.5
  TOP w0.18: v1(51.02,23.72) 51.56,23.19 52.35,23.19 52.62,22.92 U1.212 55.5,22.92 57.59,25.01 59.87,25.01 61.21,23.67 65.83,23.67 66.84,22.65 LK38.1
  BOTTOM w0.18: v1(51.02,23.72) 51.02,23.05 50.85,22.88 C35.2
IB_W: length 20.7
  TOP w0.18: LK34.1 62.23,20.62 59.94,22.9 57.78,22.9 v1(56.64,21.76) 55.97,21.76 55.73,21.52 55.43,21.52 55.32,21.42 U1.209
  BOTTOM w0.18: v1(56.64,21.76) 57.66,21.76 C31.2
IBI_BUF: length 28.1
  TOP w0.18: U1.74 21.56,30.42 v1(22.25,29.73)
  L3 w0.18: LK31.1 12.95,39.67 19.05,33.57 19.05,32.93 v1(22.25,29.73)
  BOTTOM w0.18: v1(22.25,29.73) 23.24,29.73 23.38,29.86 C28.2
IBI_SS: length 21.8
  TOP w0.18: v1(22.39,32.99) 21.91,32.99 21.34,32.42 U1.70
  L3 w0.18: v1(22.39,32.99) 21.77,32.99 12.04,42.72 LK35.1
  BOTTOM w0.18: v1(22.39,32.99) 22.82,32.99 23.38,32.43 C32.2
IBO_DAC: length 14.8
  TOP w0.18: U1.84 18.58,25.42 18.14,25.85 18.1,25.85 v1(17.81,26.15)
  L3 w0.18: LK43.1 15.72,28.24 v1(17.81,26.15)
  BOTTOM w0.18: v1(17.81,26.15) 17.81,26.87 17.3,27.38 C40.2
IBO_SS: length 27
  TOP w0.18: v1(21.96,31.98) 21.4,31.42 U1.72
  L3 w0.18: LK39.1 12.19,41.7 12.25,41.7 16.51,37.43 16.51,37.38 17.78,36.11 17.83,36.11 v1(21.96,31.98)
  BOTTOM w0.18: C36.2 23.39,31.4 22.81,31.98 v1(21.96,31.98)
IREF_DAC: length 26.5
  TOP w0.18: U1.86 18.52,24.42 v1(17.83,25.11)
  L3 w0.18: v1(17.83,25.11) 16.25,26.68 13.49,26.68 12.95,27.22 LK22.1
  BOTTOM w0.18: R25.1 23.33,25.26 22.9,25.26 22.6,25.57 21.98,25.57 21.52,25.11 v1(17.83,25.11) 17.05,25.11 R26.2 C24.2
OR<0>: length 9.9
  TOP w0.18: LK51.1 64.26,9.44 63.25,10.46 62.52,11.18 61.29,11.18 60.74,11.73 R1.2
OR<1>: length 14.3
  TOP w0.18: LK52.1 65.02,10.46 62.19,13.29 61.29,13.29 61,13 R2.2
OUT_ADC: length 13.7
  BOTTOM w0.18: R19.1 26.84,10.94 29.2,8.58 29.2,1.72 29.21,1.71 LK56.1
OUT_FS: length 38.1
  TOP w0.18: v1(50.76,16.84) 52.07,16.84 52.65,17.42 U1.201
  L3 w0.18: J1.3 68.21,39.14 65.79,36.72 65.79,29.32 62.29,25.82 58.09,25.82 53.89,21.62 53.89,17.32 53.41,16.84 v1(50.76,16.84)
OUT_Q: length 35.9
  TOP w0.18: v1(51.79,24.43) 52.64,24.43 52.65,24.42 U1.215
  L3 w0.18: J1.1 70.59,37.94 70.59,39.92 70.09,40.42 67.19,40.42 64.29,37.52 64.29,30.62 61.29,27.62 58.59,27.62 55.4,24.43 v1(51.79,24.43)
  BOTTOM w0.18: 51.72,24.5 v1(51.79,24.43)
PWR_ON: length 10.9
  TOP w0.18: U1.110 18.73,12.42 18.6,12.28 18.01,12.28 v1(17.98,12.25)
  BOTTOM w0.18: v1(17.98,12.25) 19.15,12.25 19.17,12.27 21.44,12.27 21.73,11.98 22.52,11.98 22.94,11.57 24.8,11.57 24.93,11.44 25.55,11.44 25.67,11.57 R27.1
QBUF_R: length 14
  TOP w0.18: U1.76 18.71,29.42 18.46,29.17 17.87,29.17 17.82,29.21 17.8,29.21 16.55,30.46 13.79,30.46 13.36,30.89 13.36,30.91 9.94,34.33 LK61.1
QBUF_SC: length 15
  TOP w0.18: U1.199 55.21,16.42 55.31,16.31 55.39,16.31 55.9,15.81 55.9,15.78 56.9,14.78 64.01,14.78 65.28,13.51 LK63.1
RAMP: length 22.9
  TOP w0.18: U1.97 v1(22.51,18.92)
  L3 w0.18: LK27.1 10.67,17.06 11.72,18.11 21.08,18.11 21.88,18.92 v1(22.51,18.92)
RSTB_R: length 20.4
  TOP w0.18: U1.80 21.51,27.42 22.03,27.94 23.07,27.94 v1(23.62,28.49)
  BOTTOM w0.18: LK53.1 9.65,30.27 11.79,28.13 21.59,28.13 21.78,27.94 23.07,27.94 v1(23.62,28.49)
RSTN_ADC: length 15.8
  TOP w0.18: U1.184 57.58,8.92 60.87,5.63 63.5,5.63 65.28,7.41 LK68.1
RSTN_SC: length 21.2
  TOP w0.18: LK66.1 9.35,43.73 18.66,34.42 U1.66
START_ADCB: length 17.5
  TOP w0.18: LK59.1 10.44,8.93 10.92,9.42 U1.116
TRIG<0>: length 19.5
  TOP w0.18: LK26.1 65.53,6.39 64.26,5.12 58.29,5.12 55.5,7.92 U1.182
UNNAMED_1_MAROC3_I1_OR0: length 4.2
  TOP w0.18: R1.1 57.4,11.73 56.72,12.42 U1.191
UNNAMED_1_MAROC3_I1_OR1: length 3.9
  TOP w0.18: R2.1 57.89,12.92 55.73,12.92 55.73,12.92 U1.192
UNNAMED_2_CAPCERSMDCL2_I82_B: length 4.2
  BOTTOM w0.18: R47.2 13.32,9.52 C53.2 13.99,10.57 13.99,10.56 14.89,10.56 15.08,10.75 R4.1
UNNAMED_2_CAPCERSMDCL2_I84_B: length 4.3
  BOTTOM w0.18: R3.1 51.15,8.09 v1(52.01,8.09) 52.75,8.09 52.76,8.08 C52.2 55.05,8.08 R46.2
UNNAMED_3_CAPCERSMDCL2_I242_B: length 6.2
  BOTTOM w0.18: v1(45.22,11.49) 45.22,11.22 45.75,10.69 R42.2 ; v1(45.22,11.49) 45.22,11.8 45.77,12.22 R44.2 ; v1(45.22,11.49) 44.08,11.49 C54.2 43.9,11.32 43.9,10.33 R48.1
UNNAMED_3_CON3P_I231_A: length 8.2
  TOP w0.18: J4.2 60.71,35.35 59.27,33.92 U1.234
UNNAMED_3_MAROC3_I1_ADCDAV: length 3.3
  TOP w0.18: U1.115 v1(21.85,9.92)
  BOTTOM w0.18: R18.2 22.86,9.93 22.85,9.92 v1(21.85,9.92)
UNNAMED_3_MAROC3_I1_OUTADC: length 3.5
  TOP w0.18: U1.114 21.3,10.42 21.4,10.52 21.4,10.52 21.55,10.66 22.16,10.66 22.18,10.64 v1(22.48,10.94)
  BOTTOM w0.18: R19.2 v1(22.48,10.94)
V_BG: length 20.7
  TOP w0.18: U1.200 55.76,16.92 55.99,16.69 v1(56.07,16.69) 57.48,15.28 64.52,15.28 65.32,14.48 68.13,14.48 68.16,14.52 LK23.1
  BOTTOM w0.18: v1(56.07,16.69) 56.99,16.69 57.18,16.88 C25.2
VB_OTAFSU: length 16.8
  TOP w0.18: U1.203 55.59,18.42 55.9,18.11 56.15,18.11 v1(56.63,17.63) 58.49,15.77 65.02,15.77 65.26,15.54 LK40.1
  BOTTOM w0.18: v1(56.63,17.63) 57.65,17.63 57.88,17.86 C37.2
VBI_DISCRI: length 19.3
  TOP w0.18: v1(17.73,15.97) 18.29,15.42 U1.104
  L3 w0.18: LK48.1 9.65,14.01 9.91,14.27 11.07,14.27 11.94,15.14 13.46,15.14 13.86,14.74 15.72,14.74 16.95,15.97 v1(17.73,15.97)
  BOTTOM w0.18: C45.2 23.36,15.46 22.92,15.02 19.35,15.02 18.41,15.97 v1(17.73,15.97)
VBI_DISCRIADC: length 25.6
  TOP w0.18: U1.117 v1(22.49,8.92)
  L3 w0.18: LK47.1 19.46,5.89 v1(22.49,8.92)
  BOTTOM w0.18: R36.1 23.36,8.89 C44.2 22.51,8.9 v1(22.49,8.92) 18.35,8.92 17.76,8.32 R37.2
VBI_FSB: length 20.7
  TOP w0.18: LK45.1 61.75,18.59 60,20.33 59.43,20.33 59.34,20.42 v1(55.89,20.42) U1.207
  BOTTOM w0.18: v1(55.89,20.42) 56.56,20.42 56.91,20.77 C42.2
VBI_PA: length 31.5
  TOP w0.18: U1.230 v1(56.3,31.92) 57.96,31.92 59.1,30.78 62.74,30.78 64.77,28.75 LK41.1
  BOTTOM w0.18: C38.2 57.13,31.91 57.12,31.92 v1(56.3,31.92) 52.71,31.92 52.5,32.13 51.16,32.13 51.01,31.97 48.81,31.97 48.45,32.33 47.23,32.33 R34.1 R35.2
VBI_TZ: length 23.7
  TOP w0.18: U1.89 21.47,22.92 v1(22.28,23.72)
  L3 w0.18: v1(22.28,23.72) 19.01,23.72 18.56,24.17 17.48,24.17 15.45,26.21 LK32.1
  BOTTOM w0.18: v1(22.28,23.72) 22.5,23.5 23.38,23.5 ; R29.2 R28.1 26.28,23.27 26.05,23.5 23.38,23.5 ; 23.38,23.5 23.38,23.49 C29.1
VBM_DISCRI: length 18.4
  TOP w0.18: U1.106 18.74,14.42 18.19,13.86 v1(18.19,13.75)
  L3 w0.18: v1(18.19,13.75) 16.99,13.75 15.98,12.74 13.58,12.74 12.82,11.98 LK33.1
  BOTTOM w0.18: v1(18.19,13.75) 18.66,14.23 18.67,14.23 19.1,14.66 22.76,14.66 22.8,14.62 22.98,14.44 C30.2
VBO_DISCRI: length 30
  TOP w0.18: v1(22.45,12.84) 21.96,12.84 21.38,13.42 U1.108
  L3 w0.18: LK37.1 16.51,6.9 v1(22.45,12.84)
  BOTTOM w0.18: 23.38,12.84 24.82,12.83 24.93,12.94 25.55,12.94 25.66,12.82 C34.2 ; 23.38,12.84 R32.1 ; 23.38,12.84 v1(22.45,12.84) ; 23.38,12.84 R33.2
VBO_FSB: length 15.8
  TOP w0.18: U1.205 v1(56.64,19.42) 57.32,19.42 59.11,17.63 66.86,17.63 66.92,17.57 LK49.1
  BOTTOM w0.18: C46.2 57.7,19.42 v1(56.64,19.42)
VBO_TZ: length 30.9
  TOP w0.18: U1.93 v1(22.49,20.92)
  L3 w0.18: v1(22.49,20.92) 20.43,20.92 20.18,21.16 16.23,21.16 15.16,22.22 13.85,22.22 12.75,21.13 LK36.1
  BOTTOM w0.18: C33.2 22.53,20.88 v1(22.49,20.92) 18.97,20.92 18.51,21.38 R30.1 R31.2
VCASC_FSU: length 13.5
  TOP w0.18: U1.94 v1(18.12,20.42)
  L3 w0.18: v1(18.12,20.42) 15.91,20.42 15.49,20.83 14.44,20.83 13.72,20.11 LK50.1
  BOTTOM w0.18: v1(18.12,20.42) 18.09,20.38 C47.2
VCASC_NMOS: length 19.1
  TOP w0.18: v1(51.83,31.38) 51.87,31.42 U1.229 55.75,31.42 56,31.17 57.21,31.17 58.36,30.02 62.23,30.02 64.52,27.73 LK46.1
  BOTTOM w0.18: C43.2 v1(51.83,31.38)
VCASC_PMOS: length 21.4
  TOP w0.18: v1(18.18,31.43) 18.39,31.43 18.87,31.92 U1.71
  L3 w0.18: v1(18.18,31.43) 15.78,33.83 14.89,33.83 11.34,37.38 LK42.1
  BOTTOM w0.18: C39.2 17.43,31.51 17.5,31.43 v1(18.18,31.43)
VGAIN_PA: length 15.4
  TOP w0.18: U1.69 18.4,32.92 18.22,33.09 v1(18.14,33.09)
  L3 w0.18: LK16.1 12.83,38.4 v1(18.14,33.09)
  BOTTOM w0.18: v1(18.14,33.09) 17.9,33.09 17.69,32.88 C18.2
VH: length 8.4
  TOP w0.18: U1.190 52.65,11.92 51.94,12.62 v1(51.03,12.62)
  BOTTOM w0.18: 50.16,13.47 50.16,13.47 51.01,12.62 v1(51.03,12.62) ; 50.16,13.47 49.48,13.47 49.21,13.74 R45.2 R44.1 ; 50.16,13.47 C51.2
VL: length 8
  TOP w0.18: U1.187 51.9,10.42 51.9,10.42 v1(50.94,10.42)
  BOTTOM w0.18: v1(50.94,10.42) 50.8,10.56 C50.2 49.17,10.56 49.04,10.69 R42.1 48.04,9.97 47.79,9.73 D1.2
VREF_DAC: length 14
  TOP w0.18: v1(17.8,23.42) 18.66,23.42 18.66,23.42 U1.88
  L3 w0.18: v1(17.8,23.42) 16.75,23.42 15.75,24.43 13.36,24.43 13.1,24.17 LK20.1
  BOTTOM w0.18: v1(17.8,23.42) 17.8,24.1 17.52,24.38 C22.2
VREF_FSB: length 19.2
  TOP w0.18: v1(51.84,20.92) U1.208 55.33,20.92 55.58,21.16 56.2,21.16 56.34,21.02 58.14,21.02 59.05,21.92 59.91,21.92 59.96,21.87 60,21.87 62.27,19.6 LK21.1
  BOTTOM w0.18: C23.2 50.66,20.92 v1(51.84,20.92)
VREF_FSU: length 18.4
  TOP w0.18: U1.96 v1(17.75,19.42)
  L3 w0.18: LK24.1 3.79,19.19 16.9,19.19 17.13,19.42 v1(17.75,19.42)
  BOTTOM w0.18: v1(17.75,19.42) 17.72,19.38 C26.2
VREF_RAMP: length 30.6
  TOP w0.18: U1.99 v1(22.15,17.92)
  L3 w0.18: LK17.1 10.94,15.03 11.71,15.79 13.97,15.79 14.58,15.18 15.39,15.18 16.93,16.72 20.95,16.72 v1(22.15,17.92)
  BOTTOM w0.18: 25.38,18.71 23.53,18.71 23.37,18.55 23.37,17.89 C19.2 22.86,17.88 22.83,17.92 v1(22.15,17.92) ; 25.38,18.71 25.38,18.71 R20.1 ; 25.38,18.71 27.13,18.71 27.38,18.46 R21.2
VREF_SS: length 15.8
  TOP w0.18: U1.75 v1(18.15,29.92)
  L3 w0.18: LK18.1 9.23,36.37 9.48,36.12 9.48,36.11 14.63,30.96 17.11,30.96 v1(18.15,29.92)
  BOTTOM w0.18: C20.2 17.44,29.88 17.48,29.92 v1(18.15,29.92)
VSLOPE: length 23.8
  TOP w0.18: U1.95 v1(22.17,19.92)
  L3 w0.18: LK19.1 10.57,18.08 11.18,18.68 20.92,18.68 21.72,19.48 21.73,19.48 v1(22.17,19.92)
  BOTTOM w0.18: R22.1 25.39,19.87 25.39,19.15 ; 25.39,19.15 23.59,19.15 23.38,19.36 C21.2 22.2,19.88 v1(22.17,19.92) ; 25.39,19.15 25.4,19.14 27.15,19.14 27.38,19.36 R23.2
